# Altium PCB yespls.PcbDoc
Units mil, origin at the board's own origin, x right, y up, seen from the top; angles counter-clockwise.
Board outline 1870 x 2745 mil, 2 copper layers (Top Layer, Bottom Layer); 52 components, 59 nets, 251 pads, 2 vias.
Unrouted connection lines stored in the file: 124.
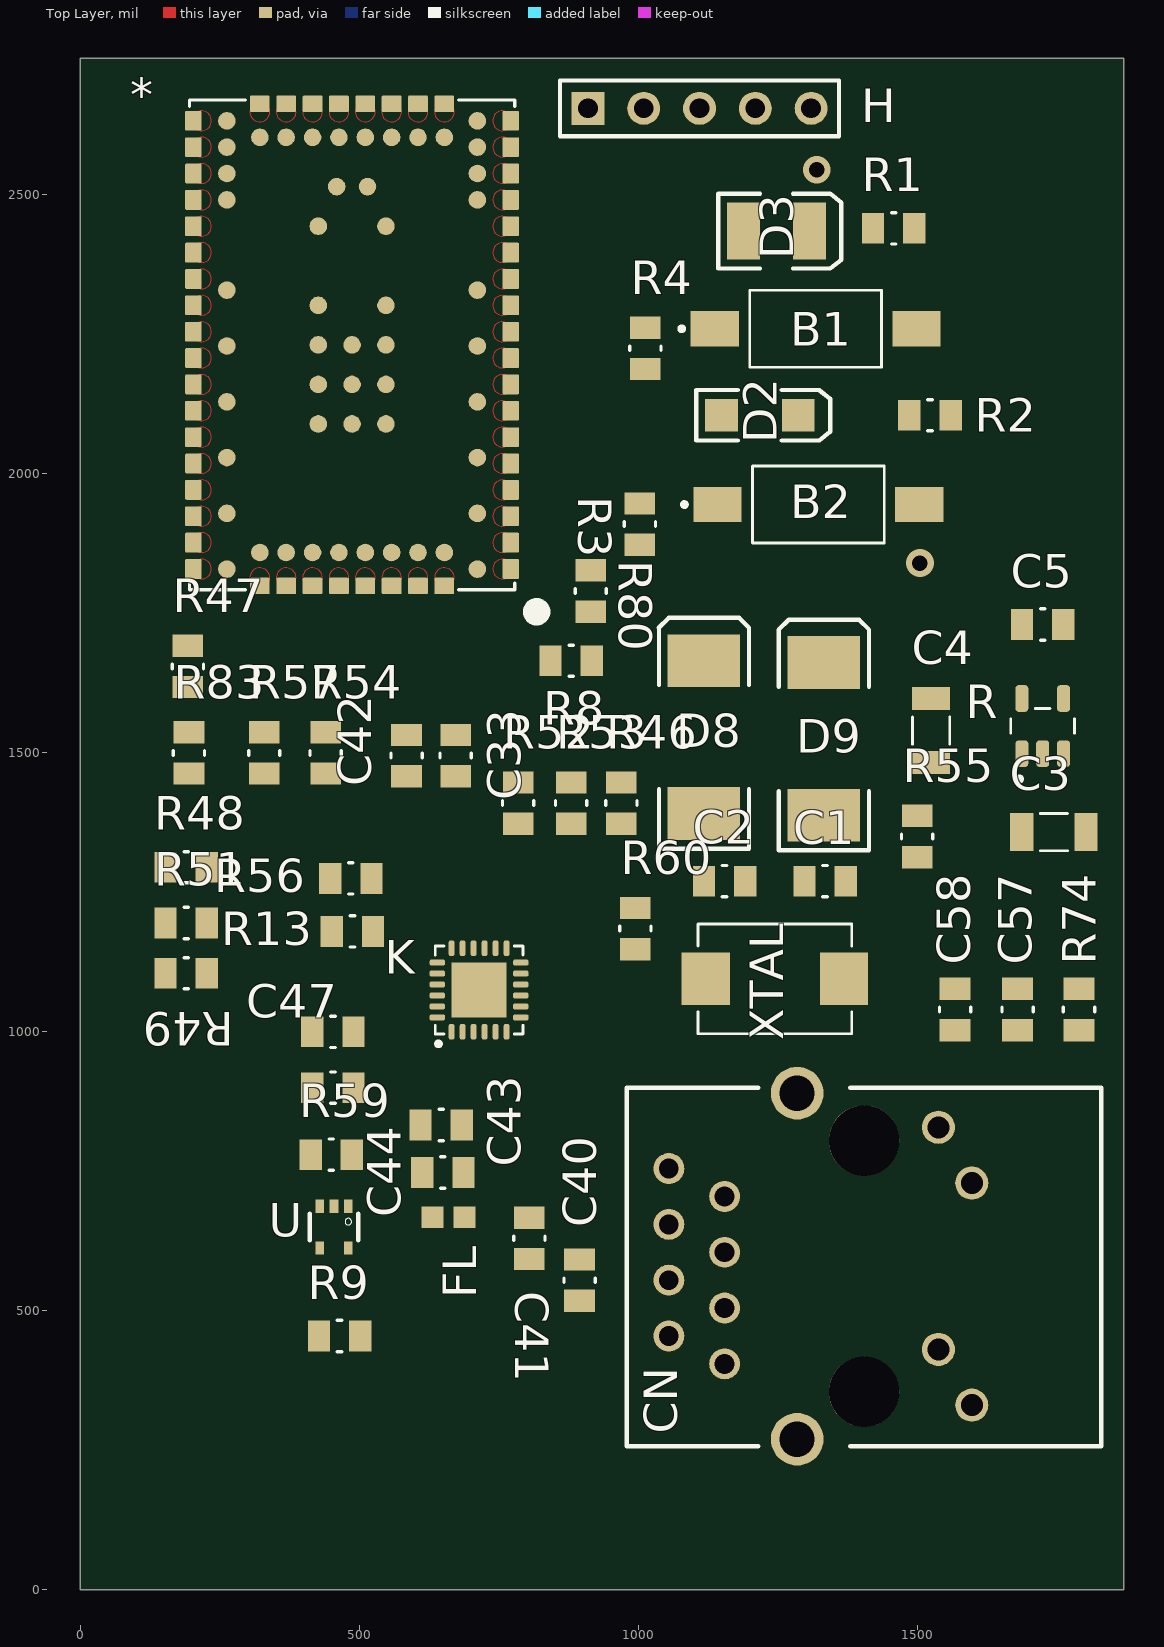
[diagram p0: Top Layer view]
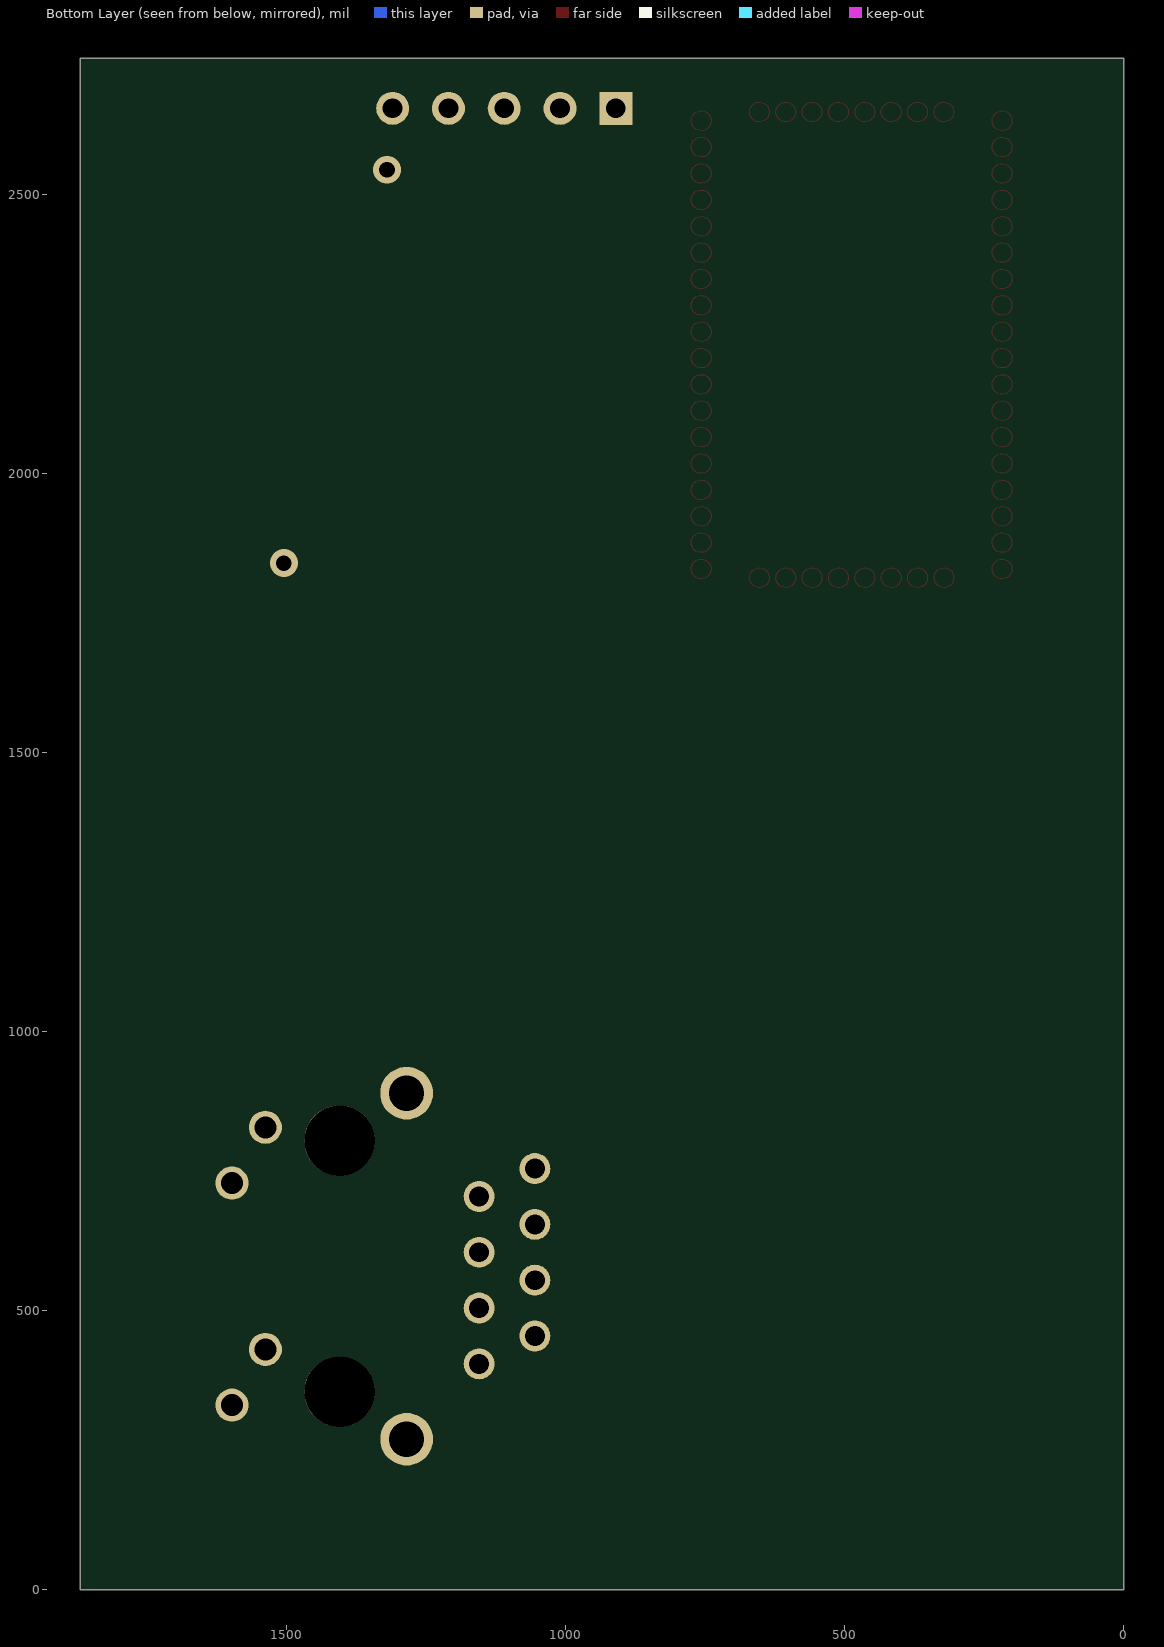
[diagram p1: Bottom Layer view, seen from below]

## Layer stack, top to bottom
Top Solder: solder mask 0.4, Solder Resist, Dk 3.5
Top Layer: signal copper 1.4
Dielectric 1: dielectric 12.6, FR-4, Dk 4.8
Bottom Layer: signal copper 1.4
Bottom Solder: solder mask 0.4, Solder Resist, Dk 3.5

## Board outline
0,2745 0,0 1870,0 1870,2745

## Design rules (kind name [scope] priority, off if disabled: settings)
Clearance [All] p1: gap=10 ignorepadtopadclearanceinfootprint=FALSE except(0: Arc-Hole Track-Hole SMDPad-Hole THPad-Hole Via-Hole Fill-Hole Poly-Hole Region-Hole Text-Hole)
PolygonConnect [All] p1: connectstyle=Relief reliefconductorwidth=10 reliefentries=4 polygonreliefangle="90 Angle" airgapwidth=10
RoomDefinition Ublox_breakout [InComponentClass('Ublox_breakout')] p1: confinementstyle=ConfineIn formatcopy=TRUE lockcomponents=FALSE outline 1875,2745 0,2745 0,0 1875,0
RoutingVias [All] p1: holewidth=28 width=50 viastyle="Through Hole" minholewidth=28 minwidth=50 maxholewidth=28 maxwidth=50
SolderMaskExpansion [All] p1: expansion=4 istentingtop=FALSE
Width [All] p1: maxlimit=10 minlimit=5 preferedwidth=10 minimp=50.000000 maximp=50.000000 favimp=50.000000
30 further rules are at their usual default settings.

## Components (designator, comment, footprint, x,y, rotation, side; value= is the part's Value field where it differs from the comment)
* "ODIN-W262" ODIN-W262 487.37,2231.13 r90 top
B1 "push button" TECO-FSMSM 1318,2260 r0 top
B2 "push button" TECO-FSMSM 1323,1945 r0 top
C1 "22uF 10V" 0805 1335,1270 r180 top value=22uF
C2 "22uF 10V" 0805 1155,1270 r0 top value=22uF
C3 "10UF 25V" 1206 1745,1358 r0 top value=10uF
C4 "10UF 25V" 1206 1525,1540 r270 top value=10uF
C5 "10nF 50V" 0805 1725,1730 r180 top value=10nF
C33 "2.2uF 16V" 0805 673,1495 r270 top value=2.2uF
C40 "100nF 50V" 0805 895,555 r270 top value=100nF
C41 "100nF 50V" 0805 805,630 r90 top value=100nF
C42 "100nF 50V" 0805 585,1495 r270 top value=100nF
C43 "2.2uF 16V" 0805 647,833 r0 top value=2.2uF
C44 "100nF 50V" 0805 650,748 r0 top value=100nF
C45 "100nF 50V" 0805 453,900 r0 top value=100nF
C47 "100nF 50V" 0805 453,1000 r0 top value=100nF
C57 "100nF 50V" 0805 1680,1040 r90 top value=100nF
C58 "100nF 50V" 0805 1568,1040 r90 top value=100nF
CN "RJ45" *RJ45_PULSEJACK 1405,580 r270 top
D2 "LED2" 3.2X1.6X1.1 1218,2105 r0 top
D3 "LED3" 3.5X2.8X1.9 1248,2435 r0 top
D8 "Diode" SMC 1118,1528.19 r90 top
D9 "Diode" SMC 1333,1525 r90 top
FL "BLM18PG300SN1D" BEADC1608X95N 660,668 r0 top
H "Header 5" HDR1X5 910,2655 r0 top
K "KSZ8081RNAIA-TR" QFN50P400X400X90-25N 715,1075 r90 top
R "LP2992IM5-1.8" SOT95P280X145-5N 1725,1548 r90 top
R1 "270" 0805 1458,2440 r180 top
R2 "270" 0805 1523,2105 r180 top
R3 "1k" 0805 1003,1910 r270 top
R4 "1k" 0805 1013,2225 r270 top
R8 "JUMPER" 0805 880,1665 r180 top value=0
R9 "120" 0805 465,455 r180 top
R13 "1k" 0805 488,1180 r180 top
R46 "10.0" 0805 970,1410 r90 top
R47 "10.0" 0805 193,1655 r90 top
R48 "10.0" 0805 190,1295 r0 top
R49 "10.0" 0805 190,1105 r0 top
R51 "10.0" 0805 190,1195 r0 top
R52 "10.0" 0805 785,1410 r90 top
R53 "10.0" 0805 880,1410 r90 top
R54 "10.0" 0805 440,1500 r90 top
R55 "1k" 0805 1500,1350 r270 top
R56 "1k" 0805 485,1275 r180 top
R57 "1k" 0805 330,1500 r90 top
R59 "1k" 0805 450,780 r0 top
R60 "6.8k" 0805 995,1185 r270 top
R74 "16m" 0805 1790,1040 r270 top
R80 "JUMPER" 0805 915,1790 r90 top value=0
R83 "4.7k" 0805 195,1500 r90 top
U "NC7SZ125" SC70-5 455,650 r180 top
XTAL "CRYSTAL 25.0000MHZ 8PF SMD" SMD-2 1245,1095 r0 top

## Footprints (in the part's own frame and the unit in brackets; to place one, negate y for a bottom-side part, rotate by r counter-clockwise, add the part's x,y. Pads: shape width x height; smd on the part's side, far side on the other; paste and mask are expansions set on the pad)
3.2X1.6X1.1 [mm]
  rect 1.5x1.5 smd: 1(-1.75,0) 2(1.75,0)
  silkscreen extent -2.9,-1.15 3.2,1.15
3.5X2.8X1.9 [mm] "SM LED; 2 C-Bend Leads; Body 3.5 x 2.8 x 1.9 mm, inc leads (LxWxH typ)"
  rect 1.5x2.6 smd: 1(-1.5,0) 2(1.5,0)
  silkscreen extent -2.65,-1.7 2.95,1.7
0805 [mil]
  rect 40x55 smd: 1(-37,0) 2(37,0)
  silkscreen extent -4,-28 4,28
1206 [mm]
  rect 1.05x1.72 smd: 1(-1.46,0) 2(1.46,0)
  silkscreen extent -0.62,-0.85 0.62,0.85
*RJ45_PULSEJACK [mm]
  round 1.408 hole 0.9: 1(4.445,-6.35) 2(3.175,-8.89) 3(1.905,-6.35) 4(0.635,-8.89) 5(-0.635,-6.35) 6(-1.905,-8.89) 7(-3.175,-6.35) 8(-4.445,-8.89)
  round 1.508 hole 1: 9(6.325,4.9) 10(3.785,3.38) 11(-3.785,4.9) 12(-6.325,3.38)
  round 3.2 hole 3.2 unplated: None(-5.715,0) None(5.715,0)
  round 2.4 hole 1.6: P$5(-7.875,-3.05) P$6(7.875,-3.05)
  silkscreen extent -8.13,-10.8 8.2,10.79
BEADC1608X95N [mm]
  rect 1x0.97 smd: 1(-0.735,0) 2(0.735,0)
HDR1X5 [mm] "Connector; Header; 5 Position"
  rect 1.5x1.5 hole 0.9: 1(0,0)
  round 1.5 hole 0.9: 2(2.54,0) 3(5.08,0) 4(7.62,0) 5(10.16,0)
  silkscreen extent -1.27,-1.27 11.43,1.27
ODIN-W262 [mm]
  round 0.8 smd: 1(6.6,-5.7) 2(7.8,-5.7) 3(9,-5.7) 4(10.2,-5.7) 5(9.45,-4.2) 6(9.45,-3) 7(9.45,-1.8) 8(9.45,-0.6) 9(9.45,0.6) 10(9.45,1.8) 11(9.45,3) 12(9.45,4.2) 13(10.2,5.7) 14(9,5.7) 15(7.8,5.7) 16(6.6,5.7) 17(-9.45,4.2) 18(-9.45,3) 19(-9.45,1.8) 20(-9.45,0.6) 21(-9.45,-0.6) 22(-9.45,-1.8) 23(-9.45,-3) 24(-9.45,-4.2) 25(-3.6,-1.54) 26(-1.8,-1.54) 27(0,-1.54) 28(1.8,-1.54) 29(5.4,-1.54) 30(7.2,-0.7) 31(-3.6,0) 32(-1.8,0) 33(0,0) 34(-3.6,1.54) 35(-1.8,1.54) 36(0,1.54) 37(1.8,1.54) 38(5.4,1.54) 39(7.2,0.7) TP1(2.49,-5.7) TP2(2.49,5.7) TP3(-0.05,-5.7) TP4(-0.05,5.7) TP5(-2.59,-5.7) TP6(-2.59,5.7) TP7(-5.13,-5.7) TP8(-5.13,5.7) TP9(-7.67,-5.7) TP10(-7.67,5.7) TP11(-10.21,-5.7) TP12(-10.21,5.7)
  rrect15% 0.9x0.75 smd paste-1 mask+0: A1(-10.2,-7.225) A2(-9,-7.225) A3(-7.8,-7.225) A4(-6.6,-7.225) A5(-5.4,-7.225) A6(-4.2,-7.225) A7(-3,-7.225) A8(-1.8,-7.225) A9(-0.6,-7.225) A10(0.6,-7.225) A11(1.8,-7.225) A12(3,-7.225) A13(4.2,-7.225) A14(5.4,-7.225) A15(6.6,-7.225) A16(7.8,-7.225) A17(9,-7.225) A18(10.2,-7.225) C1(10.2,7.225) C2(9,7.225) C3(7.8,7.225) C4(6.6,7.225) C5(5.4,7.225) C6(4.2,7.225) C7(3,7.225) C8(1.8,7.225) C9(0.6,7.225) C10(-0.6,7.225) C11(-1.8,7.225) C12(-3,7.225) C13(-4.2,7.225) C14(-5.4,7.225) C15(-6.6,7.225) C16(-7.8,7.225) C17(-9,7.225) C18(-10.2,7.225)
  rrect15% 0.75x0.9 smd paste-1 mask+0: B1(10.975,-4.2) B2(10.975,-3) B3(10.975,-1.8) B4(10.975,-0.6) B5(10.975,0.6) B6(10.975,1.8) B7(10.975,3) B8(10.975,4.2) D1(-10.975,4.2) D2(-10.975,3) D3(-10.975,1.8) D4(-10.975,0.6) D5(-10.975,-0.6) D6(-10.975,-1.8) D7(-10.975,-3) D8(-10.975,-4.2)
  Top Layer circle w0: c-3,-6.85 r0.45
  Top Layer circle w0: c-1.8,-6.85 r0.45
  Top Layer circle w0: c-0.6,-6.85 r0.45
  Top Layer circle w0: c0.6,-6.85 r0.45
  Top Layer circle w0: c1.8,-6.85 r0.45
  Top Layer circle w0: c3,-6.85 r0.45
  Top Layer circle w0: c4.2,-6.85 r0.45
  Top Layer circle w0: c5.4,-6.85 r0.45
  Top Layer circle w0: c6.6,-6.85 r0.45
  Top Layer circle w0: c7.8,-6.85 r0.45
  Top Layer circle w0: c9,-6.85 r0.45
  Top Layer circle w0: c10.2,-6.85 r0.45
  Top Layer circle w0: c-10.2,-6.85 r0.45
  Top Layer circle w0: c-9,-6.85 r0.45
  Top Layer circle w0: c-7.8,-6.85 r0.45
  Top Layer circle w0: c-6.6,-6.85 r0.45
  Top Layer circle w0: c-5.4,-6.85 r0.45
  Top Layer circle w0: c-4.2,-6.85 r0.45
  Top Layer circle w0: c3,6.85 r0.45
  Top Layer circle w0: c1.8,6.85 r0.45
  Top Layer circle w0: c0.6,6.85 r0.45
  Top Layer circle w0: c-0.6,6.85 r0.45
  Top Layer circle w0: c-1.8,6.85 r0.45
  Top Layer circle w0: c-3,6.85 r0.45
  Top Layer circle w0: c-4.2,6.85 r0.45
  Top Layer circle w0: c-5.4,6.85 r0.45
  Top Layer circle w0: c-6.6,6.85 r0.45
  Top Layer circle w0: c-7.8,6.85 r0.45
  Top Layer circle w0: c-9,6.85 r0.45
  Top Layer circle w0: c-10.2,6.85 r0.45
  Top Layer circle w0: c10.2,6.85 r0.45
  Top Layer circle w0: c9,6.85 r0.45
  Top Layer circle w0: c7.8,6.85 r0.45
  Top Layer circle w0: c6.6,6.85 r0.45
  Top Layer circle w0: c5.4,6.85 r0.45
  Top Layer circle w0: c4.2,6.85 r0.45
  Top Layer circle w0: c-10.6,4.2 r0.45
  Top Layer circle w0: c-10.6,3 r0.45
  Top Layer circle w0: c-10.6,1.8 r0.45
  Top Layer circle w0: c-10.6,0.6 r0.45
  Top Layer circle w0: c-10.6,-0.6 r0.45
  Top Layer circle w0: c-10.6,-1.8 r0.45
  Top Layer circle w0: c-10.6,-3 r0.45
  Top Layer circle w0: c-10.6,-4.2 r0.45
  Top Layer circle w0: c10.6,-4.2 r0.45
  Top Layer circle w0: c10.6,-3 r0.45
  Top Layer circle w0: c10.6,-1.8 r0.45
  Top Layer circle w0: c10.6,-0.6 r0.45
  Top Layer circle w0: c10.6,0.6 r0.45
  Top Layer circle w0: c10.6,1.8 r0.45
  Top Layer circle w0: c10.6,3 r0.45
  Top Layer circle w0: c10.6,4.2 r0.45
  silkscreen extent -12.4,-8.65 11.15,7.4, body extent -11.15,-7.4 11.15,7.4, height 4.8
QFN50P400X400X90-25N [mm]
  rrect70% 0.71x0.27 smd: 1(-1.9,1.25) 2(-1.9,0.75) 3(-1.9,0.25) 4(-1.9,-0.25) 5(-1.9,-0.75) 6(-1.9,-1.25) 13(1.9,-1.25) 14(1.9,-0.75) 15(1.9,-0.25) 16(1.9,0.25) 17(1.9,0.75) 18(1.9,1.25)
  rrect70% 0.27x0.71 smd: 7(-1.25,-1.9) 8(-0.75,-1.9) 9(-0.25,-1.9) 10(0.25,-1.9) 11(0.75,-1.9) 12(1.25,-1.9) 19(1.25,1.9) 20(0.75,1.9) 21(0.25,1.9) 22(-0.25,1.9) 23(-0.75,1.9) 24(-1.25,1.9)
  rect 2.5x2.5 smd paste-2: 25(0,0)
  silkscreen extent -2.55,-2 2,2
SC70-5 [mm]
  rect 0.4x0.6 smd: 1(-0.65,-0.95) 2(0,-0.95) 3(0.65,-0.95) 4(0.65,0.95) 5(-0.65,0.95)
  silkscreen extent -1.1,-0.6 1.1,0.6
SMC [mm] "DO-214-AB/SMC; 2 C-Bend Leads; Body 7.9 x 5.9 mm, inc. leads (LxW)"
  rect 2.4x3.3 smd: 1(-3.475,0) 2(3.475,0)
  silkscreen extent -5.07,-2.05 5.43,2.05
SMD-2 [mm]
  rect 2.2x2.4 smd: 1(-3.15,0) 2(3.15,0)
  silkscreen extent -3.5,-2.5 3.5,2.5
SOT95P280X145-5N [mm]
  rrect50% 1.21x0.59 smd: 1(-1.255,0.95) 2(-1.255,0) 3(-1.255,-0.95) 4(1.255,-0.95) 5(1.255,0.95)
  silkscreen extent -2.51,-1.45 0.8,1.45
TECO-FSMSM [mm]
  rect 2.19x1.6 smd: 1(-4.59,0) 2(4.59,0)
  silkscreen extent -6.2,-1.75 3,1.75

## Part data
B1 B2: library part Teco-FSMSM
C1 C2: library part "CAP 22uF 10V", "CAP CER 2.2UF 10V X5R 0805", Operating Temperature="-55°C ~ 85°C", Package=0805, Rating=10V, Temperature Coefficient=X5R, Tolerance=20%
C3 C4: library part "CAP 10uF 25V", "CAP CER 10UF 25V X5R 1206", Operating Temperature="-55°C ~ 85°C", Package=1206, Rating=25V, Temperature Coefficient=X5R, Tolerance=10%
C5: library part "CAP 10nF 50V", "CAP CER 10000PF 50V X7R 0805", Operating Temperature="-55°C ~ 125°C", Package=0805, Rating=50V, Temperature Coefficient=X7R, Tolerance=10%
C33 C43: library part "CAP 2.2uF 16V", "CAP CER 2.2UF 16V X7R 0805", Operating Temperature="-55°C ~ 125°C", Package=0805, Rating=16V, Temperature Coefficient=X7R, Tolerance=10%
C40 C41 C42 C44 C45 C47 C57 C58: library part "CAP 100nF 50V", "CAP CER 0.1UF 50V X7R 0805", Package=0805, Rating=50V, Tolerance=10%
CN: "Jack Modular Connector 8p8c (RJ45, Ethernet) 90Â° Angle (Right) Unshielded", Package=None, Availability=Unavailable, Check_prices=https://www.snapeda.com/parts/RJ45/Bulgin/view-part/55901/?ref=eda, MF=Bulgin, MP=RJ45, Price=None, SnapEDA_Link=https://www.snapeda.com/parts/RJ45/Bulgin/view-part/55901/?ref=snap
D2: library part "LED RED SMD", "Typical RED, GREEN, YELLOW, AMBER GaAs LED", Color=Red, Current - Test=20mA, Lens Color=Colorless, Package=1206, Voltage - Forward (Vf) (Typ)=1.7V, Lens Transparency=Clear
D3: "Typical BLUE SiC LED", DatasheetVersion=16-Apr-2002, LatestRevisionDate=17-Dec-2003, LatestRevisionNote="PCB Footprint replaced.", PackageDescription="SM LED; 2 C-Bend Leads; Body 3.5 x 2.8 x 1.9 mm, inc leads (LxWxH typ)", PackageReference=3.5X2.8X1.9, PackageVersion=16-Apr-2002, Published=8-Jun-2000, Publisher="Altium Limited"
D8 D9: "Default Diode", Code_JEDEC=DO-214-AB, LatestRevisionDate=17-Jul-2002, LatestRevisionNote="Re-released for DXP Platform.", PackageDescription="DO-214-AB/SMC; 2 C-Bend Leads; Body 7.9 x 5.9 mm, inc. leads (LxW)", PackageReference=SMC, PackageVersion=Sep-1996, Published=8-Jun-2000, Publisher="Altium Limited"
FL: "30 Ohms @ 100MHz 1 Power Line Ferrite Bead 0603 _1608 Metric_ 1A 50mOhm", Package="1608 Murata", Availability=Unavailable, MF=Murata, MP=BLM18PG300SN1D, Price=None, SnapEDA_Link=https://www.snapeda.com/parts/BLM18PG300SN1D/Murata/view-part/270173/?ref=snap
H: "Header, 5-Pin", LatestRevisionDate=17-Jul-2002, LatestRevisionNote="Re-released for DXP Platform.", Publisher="Altium Limited"
K: "1/1 Transceiver Full RMII 24-QFN _4x4_", Package="QFN-24 Microchip", Availability=Unavailable, MF=Microchip, MP=KSZ8081RNAIA-TR, Price=None, SnapEDA_Link=https://www.snapeda.com/parts/KSZ8081RNAIA-TR/Microchip/view-part/482545/?ref=snap
R: Package=None, Availability=Unavailable, MP=LP2992IM5-1.8/NOPB, Price=None
R1 R2: library part "RES 270 1/8W", "RES SMD 270 OHM 5% 1/8W 0805", Package=0805, Power (Watts)=0.125W, Tolerance=5%
R3 R4 R13 R55 R56 R57 R59: library part "RES 1k 1/8W", "RES SMD 1K OHM 5% 1/8W 0805", Package=0805, Power (Watts)=0.125W, Tolerance=5%
R8 R80: library part "RES 0 JUMPER", "RES SMD 0 OHM JUMPER GENERIC 0805", Package=0805
R9: library part "RES 120.0 1/8W", "RES SMD 120 OHM 5% 1/8W 0805", Package=0805, Power (Watts)=0.125W, Tolerance=5%
R46 R47 R48 R49 R51 R52 R53 R54: library part "RES 10.0 1/8W - 5%", "RES SMD 10.0 OHM 5% 1/8W 0805", Package=0805, Power (Watts)=0.125W, Tolerance=5%
R60: library part "RES 6.8k 1/8W", "RES SMD 6.8K OHM 5% 1/8W 0805", Package=0805, Power (Watts)=0.125W, Tolerance=5%
R74: library part "RES 16m 1/2W", "RES SMD 0.016 OHM 1% 1/2W 0805 Thick Film", Case Code (Imperial)=0805, Case Code (Metric)=2012, Manufacturer=Panasonic, Manufacturer Part Number=ERJ-6BWFR016V, Max Operating Temperature=155°C, Max Power Dissipation=500mW, Min Operating Temperature=-55°C, Package Quantity=1, Resistance=16mR, Supplier Part Number 1=P.016AQCT-ND, Temperature Coefficient=200ppm/°C, Tolerance=1%, Case/Package=0805, Category="Chip SMD Resistors", ComponentLink1Description=https://datasheet.ciiva.com/11808/0900766b8126441d-11808690.pdf?src-supplier=RSComponents, ComponentLink1URL=https://datasheet.ciiva.com/11808/0900766b8126441d-11808690.pdf?src-supplier=RSComponents, ComponentLink2Description=https://datasheet.ciiva.com/2452/aoa0000ce3-2452594.pdf?src-supplier=Digi-Key, ComponentLink2URL=https://datasheet.ciiva.com/2452/aoa0000ce3-2452594.pdf?src-supplier=Digi-Key, ComponentLink3Description=https://datasheet.ciiva.com/2452/aoa0000ce3-2452592.pdf?src-supplier=Digi-Key, ComponentLink3URL=https://datasheet.ciiva.com/2452/aoa0000ce3-2452592.pdf?src-supplier=Digi-Key, ComponentLink4Description=https://datasheet.ciiva.com/2452/aoa0000ce3-2452593.pdf?src-supplier=Digi-Key, ComponentLink4URL=https://datasheet.ciiva.com/2452/aoa0000ce3-2452593.pdf?src-supplier=Digi-Key, ComponentLink5Description=https://datasheet.ciiva.com/9192/aoa0000ce3-9192761.pdf?src-supplier=Avnet, ComponentLink5URL=https://datasheet.ciiva.com/9192/aoa0000ce3-9192761.pdf?src-supplier=Avnet, ComponentLink6Description=https://datasheet.ciiva.com/17211/aoa0000ce3-17211370.pdf?src-supplier=Avnet+Europe, ComponentLink6URL=https://datasheet.ciiva.com/17211/aoa0000ce3-17211370.pdf?src-supplier=Avnet+Europe, Composition="Thick Film", Contact Plating=Tin, Depth=1.25mm, Features="Automotive AEC-Q200", Height=0.028inch, Lead Free="Lead Free", Length=2mm, Military Standard=Not, Mount="Surface Mount", Number of Pins=2, Number of Terminations=2, Packaging="Tape and Reel", Power Rating=500mW, Pricing 1="1=0.65000, 10=0.53800, 100=0.36140, 1000=0.21148, 2500=0.20917 (USD)", Radiation Hardening=No, RoHS=Yes, Stock 1=4585, Supplier 1=Digi-Key, Termination=SMD/SMT, Width=0.049inch
R83: library part "RES 4.7k 1/8W - 5%", "RES SMD 4.7k OHM 5% 1/8W 0805", Package=0805, Power (Watts)=0.125W, Tolerance=5%
U: "Buffer, Non-Inverting 1 Element 1 Bit per Element 3-State Output SC-70-5", Package="SC-70 ON Semiconductor", Availability=Unavailable, MF="ON Semiconductor", MP=NC7SZ125, Price=None, SnapEDA_Link=https://www.snapeda.com/parts/NC7SZ125/ON%20Semiconductor/view-part/2686816/?ref=snap
XTAL: library part "XTAL 25MHZ 8PF SMD", "25MHz ±50ppm Crystal 8pF 70 Ohms 2-SMD, No Lead", Frequency=25MHz, Load Capacitance=8pF, Package="2-SMD, No Lead", Supplier Part Number 1=644-1041-1-ND, Digikey=644-1041-1-ND, Digikey Link=https://www.digikey.ca/product-detail/en/ndk-america-inc/NX5032GA-25.000000MHZ-LN-CD-1/644-1041-1-ND/1128913, ESR="70 Ohms", MF="NDK America, Inc.", MP=NX5032GA-25.000000MHZ-LN-CD-1, Price="0.95 CAD", Supplier 1=Digi-Key

## Via types
v1: diameter 50, hole 28, Top Layer to Bottom Layer, 2 vias

## Nets (pads, with @x,y where several pads share a name; then routed paths per layer and width w, separated by ;. In a path a pad name is that pad's centre, name@x,y a point inside that pad or via, vN(x,y) a via of type N, cw(c..) or ccw(c..) an arc to the next point about the centre after c; other vN are vias at no path point)
3v3: H.1
BlueLED: *.A9 D3.1
ETH_CRSDV: *.D4 R54.2 R57.2
ETH_MC: K.10 R47.1 R83.2
ETH_MDIO: K.11 R46.1
ETH_REFCLK: *.D8 K.16
ETH_RXD0: *.D5 R52.2
ETH_RXD1: *.D6 R53.2
ETH_TXD0: *.D1 R49.1
ETH_TXD1: *.D2 R51.1
ETH_TXEN: *.D3 R48.1
GND: B1.2 B2.2 H.5 R1.1 R2.1
  other v1: 1505,1840 1320,2545
INV_TO_RJ45: CN.10 R9.1
KSZ_RST_OUT: D8.1 D9.1 K.24 R55.1
MAIN_RESET: *.A1 H.2 R80.2
Net*_1: *.1 *.2 *.3 *.4 *.5 *.6 *.7 *.8 *.9 *.10 *.11 *.12 *.13 *.14 *.15 *.16 *.17 *.18 *.19 *.20 *.21 *.22 *.23 *.24 *.25 *.26 *.27 *.28 *.29 *.30 *.31 *.32 *.33 *.34 *.35 *.36 *.37 *.38 *.39 *.A3 *.C1 *.C3 *.C4 *.C7
Net*_D7: *.D7 R8.2
NetC1_2: C1.2 C2.2
NetC3_1: C3.1 R.1
NetC3_2: C3.2 R.2
NetC4_1: C4.1 R.5
NetC5_1: C5.1 R.4
NetC33_2: C33.2 C42.2 K.14
NetC40_2: C40.2 CN.3
NetC41_2: C41.2 CN.6
NetC57_2: C57.2 C58.2 R74.1
NetD2_2: D2.2 R2.2
NetD3_2: D3.2 R1.2
NetD8_2: D8.2 R8.1 R80.1
NetK_9: K.9 R60.2
NetK_12: K.12 R53.1
NetK_13: K.13 R52.1
NetK_15: K.15 R54.1
NetK_17: K.17 R56.1
NetK_18: K.18 R13.1
NetK_19: K.19 R48.2
NetK_20: K.20 R49.2
NetK_21: K.21 R51.2
NetK_22: K.22 K.25
NetR9_2: R9.2 U.4
NetR57_1: R57.1 R83.1
NetU_2: U.2 U.3
PHY_LED0: K.23 R59.2 U.1
PHY_RXN: CN.8 K.3
PHY_RXP: CN.7 K.4
PHY_TXN: CN.2 K.5
PHY_TXP: CN.1 K.6
RedLED: *.A7 D2.1
RJ_45_GND: C57.1 C58.1 CN.4 CN.5 R74.2
RMII_MDC: *.C15 R47.2
RMII_MDIO: *.C14 R46.2
SWITCH0: *.A6 B2.1 R3.1
SWITCH1: *.A8 B1.1 R4.1
UART_RXD: *.A13 H.3
UART_TXD: *.A11 H.4
VDD_1v2: C45.2 C47.2 K.1
VDDA_3.3: C43.2 C44.2 FL.2 K.2
X0: C1.1 K.7 XTAL.2
X1: C2.1 K.8 XTAL.1
pads on no net: *.A2 *.A4 *.A5 *.A10 *.A12 *.A14 *.A15 *.A16 *.A17 *.A18 *.B1 *.B2 *.B3 *.B4 *.B5 *.B6 *.B7 *.B8 *.C2 *.C5 *.C6 *.C8 *.C9 *.C10 *.C11 *.C12 *.C13 *.C16 *.C17 *.C18 *.TP1 *.TP2 *.TP3 *.TP4 *.TP5 *.TP6 *.TP7 *.TP8 *.TP9 *.TP10 *.TP11 *.TP12 C4.2 C5.2 C33.1 C40.1 C41.1 C42.1 C43.1 C44.1 C45.1 C47.1 CN.9 CN.11 CN.12 CN.None CN.P$5 CN.P$6 D9.2 FL.1 R3.2 R4.2 R13.2 R55.2 R56.2 R59.1 R60.1 R.3 U.5

## Other copper
Top Layer:
  rectangle net 3v3: 2190,2065 3265,3023.07
Bottom Layer:
  rectangle net GND: 2250,1115 2765,1855

## Text inside footprints (layer, text, board x,y; h text height)
CN: Mechanical 4 "NO TRACE ZONE" at 1747.81,952.19 h73.82 r270; Mechanical 4 "NO TRACE ZONE" at 1747.81,952.19 h73.82 r270